# Altium PCB PCB1.pcbdoc (part 2 of 2)
Units mil, origin at the board's own origin, x right, y up, seen from the top; angles counter-clockwise.
Board outline 3346.4 x 3346.4 mil, 4 copper layers (Top Layer, Inner1, Inner2, Bottom Layer), stack 62.5 mil thick; 85 components, 61 nets, 352 pads, 250 vias.
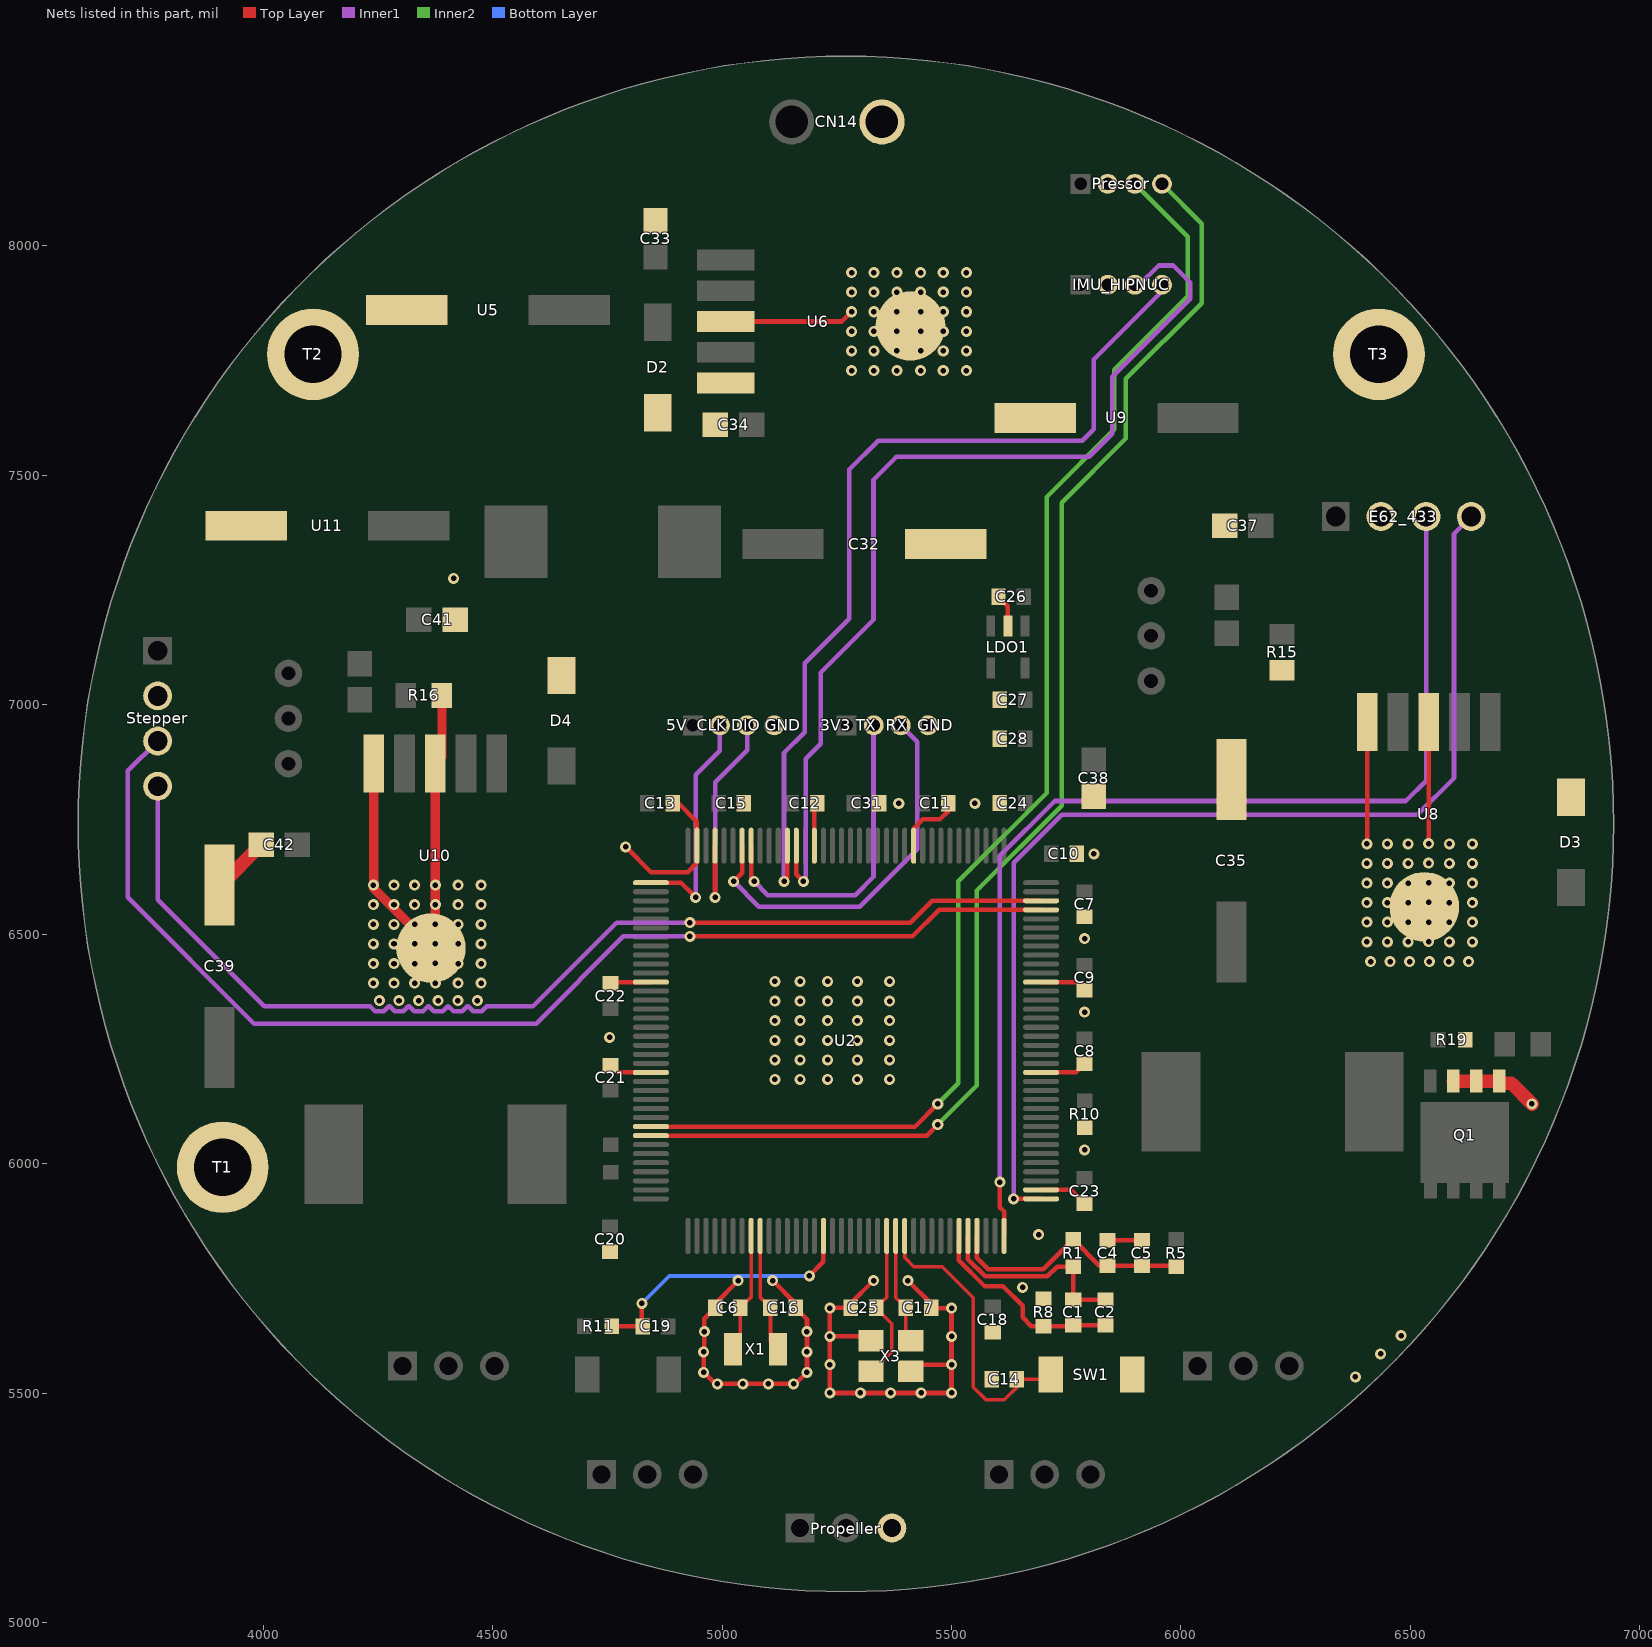
[diagram p4: the nets of this part, all layers, seen from the top]

## Via types
v1: diameter 24, hole 12, Top Layer to Bottom Layer, 250 vias

## Nets (pads, with @x,y where several pads share a name; then routed paths per layer and width w, separated by ;. In a path a pad name is that pad's centre, name@x,y a point inside that pad or via, vN(x,y) a via of type N, cw(c..) or ccw(c..) an arc to the next point about the centre after c; other vN are vias at no path point) (continued)
GND: "3V3 TX  RX  GND.4" "5V  CLK DIO GND.4" C4.2 C5.2 C6.2 C7.2 C8.1 C9.1 C10.1 C11.1 C12.1 C13.1 C14.2 C15.2 C16.2 C17.1 C18.1 C19.1 C20.1 C21.1 C22.1 C23.1 C24.1 C25.2 C26.1 C27.1 C28.1 C31.1 C32.2 C33.1 C34.1 C35.2 C37.1 C38.1 C39.2 C41.1 C42.1 CN14.1 D2.1 D3.1 D4.1 E62_433.2 IMU_HIPNUC.2 LDO1.2 Pressor.2 Propeller.3 Q1.1 Q1.2 Q1.3 R8.1 R10.1 R11.1 R15.2 R16.2 R19.1 Stepper.2 SW1.1 T1.1 T2.1 T3.1 U2.16 U2.38 U2.51 U2.61 U2.83 U2.94 U2.107 U2.120 U2.130 U5.2 U6.3 U6.5 U6.6 U8.3 U8.5 U8.6 U9.2 U10.3 U10.5 U10.6 U11.2 X3.2 X3.4 | length 5750.2
  Top Layer w10: C21.1@4757,6214.6 4772.8,6198.8 U2.130@4844.8,6198.8 ; C22.1@4757,6392.7 4759.9,6395.7 U2.120@4844.8,6395.7 ; R11.1@4759.3,5645.5 4759.7,5645.2 C19.1@4827.4,5645.2 4825,5647.6 v1(4825,5695.2) ; v1(4790,6690.2) 4845,6635.2 4925,6635.2 4945.2,6655.4 U2.107@4945.2,6692.9 4945.2,6745 4905,6785.2 C13.1@4892.6,6785.2 ; U6.3@5007.8,7835.2 5260.8,7835.2 v1(5282.2,7856.5) ; v1(5035,5745.2) 4984.8,5695 C6.2@4984.8,5685.8 4961.2,5662.2 v1(4961.2,5634.1) 4961.2,5590.9 v1(4960,5589.6) v1(4960,5545.2) 4985,5520.2 v1(4990,5520.2) v1(5045.4,5520.2) v1(5100.7,5520.2) v1(5156.1,5520.2) 5160,5520.2 v1(5185,5545.2) v1(5185,5589.6) v1(5185,5634.1) 5185,5661.2 C16.2@5160.5,5685.8 5160.5,5694.7 v1(5110,5745.2) ; v1(5190,5755.2) 5220.8,5785.9 U2.16@5220.8,5842.5 ; U2.94@5201.1,6692.9 5201.1,6778.7 C12.1@5207.6,6785.2 ; X3.4@5324.6,5614.2 5315.3,5623.5 v1(5235,5623.5) ; v1(5330,5745.2) 5280.4,5695.5 C25.2@5280.4,5685.8 5235.6,5685.8 v1(5235,5685.2) v1(5235,5623.5) ; v1(5405,5745.2) 5455.5,5694.7 C17.1@5455.5,5685.8 5456.1,5685.2 v1(5500,5685.2) v1(5500,5623.5) v1(5500,5561.8) ; X3.2@5411.2,5547.3 5425.8,5561.8 v1(5500,5561.8) ; U2.83@5417.6,6692.9 5417.6,6730.4 5437.4,6750.2 5474.9,6750.2 5492.6,6767.8 C11.1@5492.6,6785.2 ; C26.1@5602.4,7235.2 5622.9,7214.7 LDO1.2@5622.9,7171.2 ; U2.38@5695.2,5942.9 5759.7,5942.9 C23.1@5790,5912.6 ; U2.51@5695.2,6198.8 5771.2,6198.8 C8.1@5790,6217.6 ; U2.61@5695.2,6395.7 5695.7,6395.2 5772.4,6395.2 C9.1@5790,6377.6 ; C4.2@5840,5832.7 C5.2@5915,5832.7 ; v1(6405,6697) 6406,6698 U8.5@6406,6962.3 ; v1(6540,6697.4) U8.3@6540,6962.3 ; v1(5235,5623.5) v1(5235,5561.8) v1(5235,5500.2) v1(5301.3,5500.2) v1(5367.5,5500.2) v1(5433.8,5500.2) v1(5500,5500.2) v1(5500,5561.8)
  Top Layer w20: U10.5@4241,6872.3 4241,6599.5 4362.5,6478 4375,6490.5 v1(4375,6521.8) v1(4375,6564.5) v1(4375,6607.2) U10.3@4375,6872.3 4389.4,6886.7 R16.2@4389.4,7020.2
  Top Layer w30: C39.2@3905,6607.3 3907.8,6607.3 C42.1@3995.6,6695.2 ; Q1.3@6593.6,6179.6 Q1.2@6643.7,6179.6 Q1.1@6693.6,6179.6 6698,6175.2 6720,6175.2 v1(6765,6130.2)
  Bottom Layer w8: v1(4825,5695.2) 4885,5755.2 v1(5190,5755.2)
  other v1: 6380,5535.2 6435,5585.2 6480,5625.2 5655,5730.2 5690,5845.2 5790,6030.2 5115,6183.4 5170,6183.4 5230,6183.4 5295,6183.4 5365,6183.4 5115,6226.1 5170,6226.1 5230,6226.1 5295,6226.1 5365,6226.1 5115,6268.8 5170,6268.8 5230,6268.8 5295,6268.8 5365,6268.8 4755,6275.2 5115,6311.5 5170,6311.5 5230,6311.5 5295,6311.5 5365,6311.5 5790,6330.2 5115,6354.2 5170,6354.2 5230,6354.2 5295,6354.2 5365,6354.2 4253.2,6355.2 4295.9,6355.2 4338.6,6355.2 4381.4,6355.2 4424.1,6355.2 4466.8,6355.2 4240,6393.4 4285,6393.4 4330,6393.4 4425,6393.4 4475,6393.4 4375,6393.6 5115,6397 5170,6397 5230,6397 5295,6397 5365,6397 4240,6436.1 4285,6436.1 4330,6436.1 4375,6436.3 4425,6436.1 4475,6436.1 6413.2,6440.2 6455.9,6440.2 6498.6,6440.2 6541.4,6440.2 6584.1,6440.2 6626.8,6440.2 4240,6478.8 4285,6478.8 4330,6478.8 4375,6479 4425,6478.8 4475,6478.8 6405,6483.4 6450,6483.4 6495,6483.4 6585,6483.4 6635,6483.4 6540,6483.8 5790,6490.2 4240,6521.5 4285,6521.5 4330,6521.5 4425,6521.5 4475,6521.5 6405,6526.1 6450,6526.1 6495,6526.1 6540,6526.5 6585,6526.1 6635,6526.1 4240,6564.2 4285,6564.2 4330,6564.2 4425,6564.2 4475,6564.2 6405,6568.8 6450,6568.8 6495,6568.8 6540,6569.2 6585,6568.8 6635,6568.8 4240,6607 4285,6607 4330,6607 4425,6607 4475,6607 6405,6611.5 6450,6611.5 6495,6611.5 6540,6612 6585,6611.5 6635,6611.5 6405,6654.2 6450,6654.2 6495,6654.2 6585,6654.2 6635,6654.2 6540,6654.7 5810,6675.2 6450,6697 6495,6697 6585,6697 6635,6697 5385,6785.2 5550.8,6785.2 4415,7275.2 5282.2,7728.4 5330.6,7728.4 5381.1,7728.4 5432.6,7728.4 5482,7728.4 5532.5,7728.4 5282.2,7771.1 5330.6,7771.1 5381.1,7771.1 5432.6,7771.1 5482,7771.1 5532.5,7771.1 5282.2,7813.8 5330.6,7813.8 5381.1,7813.8 5432.6,7813.8 5482,7813.8 5532.5,7813.8 5330.6,7856.5 5381.1,7856.5 5432.6,7856.5 5482,7856.5 5532.5,7856.5 5282.2,7899.2 5330.6,7899.2 5381.1,7899.2 5432.6,7899.2 5482,7899.2 5532.5,7899.2 5282.2,7942 5330.6,7942 5381.1,7942 5432.6,7942 5482,7942 5532.5,7942
HSE_IN: C25.1 U2.23 X3.1 | length 339.3
  Top Layer w8: X3.1@5324.6,5547.3 5327.1,5547.3 5370,5590.2 5370,5651.2 C25.1@5335.5,5685.8 5358.6,5708.9 U2.23@5358.6,5842.5
HSE_OUT: C17.2 U2.24 X3.3 | length 241.9
  Top Layer w8: U2.24@5378.3,5842.5 5378.3,5707.8 C17.2@5400.4,5685.8 5400.4,5625.1 X3.3@5411.2,5614.2
I2C1_SCL_PB6: Pressor.3 U2.136 | length 2924.3
  Top Layer w10: U2.136@4844.8,6080.7 5420.5,6080.7 v1(5470,6130.2)
  Inner2 w10: v1(5470,6130.2) 5515,6175.2 5515,6615.2 5707.5,6807.7 5707.5,7452.7 5855,7600.2 5855,7730.2 6015,7890.2 6015,8019.7 Pressor.3@5899.5,8135.2
I2C1_SDA_PB7: Pressor.4 U2.137 | length 2959.2
  Top Layer w10: U2.137@4844.8,6061 5445.9,6061 v1(5470,6085.2)
  Inner2 w10: v1(5470,6085.2) 5555,6170.2 5555,6595.2 5740,6780.2 5740,7440.2 5880,7580.2 5880,7710.2 6045,7875.2 6045,8048.7 Pressor.4@5958.6,8135.2
LSE_IN: C6.1 U2.8 X1.1 | length 263.1
  Top Layer w8: X1.1@5023.7,5595.8 5039.9,5612 C6.1@5039.9,5685.8 5063.3,5709.1 U2.8@5063.3,5842.5
LSE_OUT: C16.1 U2.9 X1.2 | length 262.9
  Top Layer w8: U2.9@5083,5842.5 5083,5708.1 C16.1@5105.4,5685.8 5105.4,5612.5 X1.2@5122.1,5595.8
NRST: C14.1 SW1.2 U2.25 | length 641.4
  Top Layer w8: U2.25@5397.9,5842.5 5397.9,5795.2 5417.9,5775.2 5480,5775.2 5547.5,5707.7 5547.5,5512.7 5575,5485.2 5615,5485.2 5642.6,5512.7 C14.1@5642.6,5530.2 5706.4,5530.2 SW1.2@5716.4,5540.2
SWCLK: "5V  CLK DIO GND.2" U2.109 | length 507.8
  Top Layer w10: U2.109@4844.8,6612.2 4910.4,6612.2 v1(4942.5,6580.2)
  Inner1 w10: v1(4942.5,6580.2) 4942.5,6847.6 4995,6900.2 4995,6954.7 4995.5,6955.2
SWDIO: "5V  CLK DIO GND.3" U2.105 | length 516.7
  Top Layer w10: U2.105@4984.6,6692.9 4984.6,6580.6 v1(4985,6580.2)
  Inner1 w10: v1(4985,6580.2) 4985,6831.2 5054.5,6900.7 5054.5,6955.2
USART1_RX_PA10: "3V3 TX  RX  GND.3" U2.102 | length 844.7
  Top Layer w10: v1(5025,6615.2) 5043.6,6633.8 U2.102@5043.6,6692.9
  Inner1 w10: v1(5025,6615.2) 5080,6560.2 5300,6560.2 5425,6685.2 5425,6919.7 5389.5,6955.2
USART1_TX_PA9: "3V3 TX  RX  GND.2" U2.101 | length 699.8
  Top Layer w10: U2.101@5063.3,6692.9 5063.3,6621.7 v1(5069.9,6615.2)
  Inner1 w10: v1(5069.9,6615.2) 5099.9,6585.2 5290,6585.2 5330,6625.2 5330,6954.7 5330.5,6955.2
USART2_RX_PA3: E62_433.4 U2.37 | length 2413.8
  Top Layer w10: v1(5635.5,5923.1) 5635.6,5923.2 U2.37@5695.2,5923.2
  Inner1 w10: v1(5635.5,5923.1) 5635.5,6655.7 5740,6760.2 6515,6760.2 6595,6840.2 6595,7372.5 E62_433.4@6632.6,7410.2
USART2_TX_PA2: E62_433.3 U2.36 | length 2404.3
  Top Layer w10: v1(5605.5,5959.7) 5605.5,5904.6 5614.5,5895.7 U2.36@5614.5,5842.5
  Inner1 w10: v1(5605.5,5959.7) 5605.5,6670.7 5725,6790.2 6490,6790.2 6534.2,6834.4 E62_433.3@6534.2,7410.2
USART3_RX_PB11: Stepper.4 U2.70 | length 2417.9
  Top Layer w10: v1(4930,6525.2) 5410,6525.2 5457.7,6572.8 U2.70@5695.2,6572.8
  Inner1 w10: Stepper.4@3770,6822.5 3770,6575.2 4002.1,6343.1 4232.8,6343.1 4243.7,6332.2 4262.7,6332.2 4273.6,6343.1 4275.5,6343.1 4286.4,6332.2 4305.4,6332.2 4316.4,6343.1 4318.2,6343.1 4329.1,6332.2 4348.2,6332.2 4359.1,6343.1 4360.9,6343.1 4371.8,6332.2 4390.9,6332.2 4401.8,6343.1 4403.6,6343.1 4414.6,6332.2 4433.6,6332.2 4444.5,6343.1 4446.4,6343.1 4457.3,6332.2 4476.3,6332.2 4487.2,6343.1 4587.9,6343.1 4770,6525.2 v1(4930,6525.2)
USART3_TX_PB10: Stepper.3 U2.69 | length 2574.4
  Top Layer w10: v1(4930,6495.2) 5415,6495.2 5473,6553.1 U2.69@5695.2,6553.1
  Inner1 w10: Stepper.3@3770,6920.9 3705,6855.9 3705,6580.2 3980,6305.2 4595,6305.2 4785,6495.2 v1(4930,6495.2)
USART6_RX_PC7: IMU_HIPNUC.4 U2.97 | length 1982.5
  Top Layer w10: v1(5135,6615.2) 5142.1,6622.2 U2.97@5142.1,6692.9
  Inner1 w10: v1(5135,6615.2) 5135,6895.2 5180,6940.2 5180,7090.2 5277.5,7187.7 5277.5,7512.7 5340,7575.2 5785,7575.2 5810,7600.2 5810,7752.4 5958.6,7901 IMU_HIPNUC.4@5958.6,7915.2
USART6_TX_PC6: IMU_HIPNUC.3 U2.96 | length 2137.4
  Top Layer w10: U2.96@5161.7,6692.9 5161.7,6630.8 v1(5177.4,6615.2)
  Inner1 w10: v1(5177.4,6615.2) 5182.4,6620.2 5182.4,6882.5 5215,6915.2 5215,7070.2 5330,7185.2 5330,7490.2 5380,7540.2 5800,7540.2 5850,7590.2 5850,7715.2 6020,7885.2 6020,7920.2 5982.9,7957.2 5951.6,7957.2 5909.5,7915.2 IMU_HIPNUC.3@5899.5,7915.2
VDDA: C4.1 C5.1 R1.2 R5.1 U2.33 | length 543.6
  Top Layer w10: U2.33@5555.4,5842.5 5555.4,5795 5580.3,5770.2 5700.3,5770.2 R1.2@5765,5834.8 5822.2,5777.6 C4.1@5840,5777.6 C5.1@5915,5777.6 5987.9,5777.6 R5.1@5990,5775.5
VREF+: C1.2 C2.2 R1.1 U2.32 | length 446.7
  Top Layer w10: U2.32@5535.8,5842.5 5535.8,5792 5573.6,5754.2 5709,5754.2 5730.3,5775.5 R1.1@5765,5775.5 5765,5703.8 C1.2@5765.5,5703.2 C2.2@5835.5,5703.2
VSSA: C1.1 C2.1 R8.2 U2.31 | length 437.6
  Top Layer w10: U2.31@5516.1,5832.5 5516.1,5789.1 5572,5733.2 5612,5733.2 5655,5690.2 5655,5665.2 5674.1,5646 R8.2@5700.5,5646 5763.4,5646 C1.1@5765.5,5648.1 C2.1@5835.5,5648.1
pads on no net: LDO1.4 R2.3 R17.3 U2.1 U2.2 U2.3 U2.4 U2.5 U2.6 U2.7 U2.10 U2.28 U2.29 U2.44 U2.45 U2.46 U2.47 U2.49 U2.50 U2.53 U2.54 U2.55 U2.56 U2.57 U2.58 U2.59 U2.60 U2.63 U2.64 U2.65 U2.66 U2.67 U2.68 U2.73 U2.74 U2.75 U2.76 U2.77 U2.78 U2.79 U2.80 U2.86 U2.87 U2.88 U2.89 U2.90 U2.91 U2.92 U2.93 U2.98 U2.99 U2.100 U2.103 U2.104 U2.110 U2.111 U2.112 U2.114 U2.115 U2.117 U2.118 U2.119 U2.122 U2.123 U2.124 U2.125 U2.126 U2.127 U2.128 U2.129 U2.132 U2.133 U2.134 U2.135 U2.139 U2.140 U2.141 U2.142

## Polygon pours and split planes (outlines as drawn)
GND on Top Layer (solid, remove dead copper, pour order 0): 3000,8610.2 3000,4795.2 7505,4795.2 7505,8610.2
GND on Inner1 (solid, remove dead copper): 3130,8620.2 3130,4735.2 7380,4735.2 7380,8620.2
GND on Inner2 (solid, remove dead copper): 3105,8645.2 3105,4640.2 7475,4640.2 7475,8645.2
GND on Bottom Layer (solid, remove dead copper, pour order 2): 3020,8685.2 3020,4730.2 7265,4730.2 7265,8685.2

## Keep-outs
Board Outline Layer:
  region: 4937.9,5726.1 4937.9,5480.8 5517.9,5480.8 5517.9,5726.1
  region: 4475,7560.2 4475,7150.2 5000,7150.2 5000,7560.2
  region: 4079.7,6277.4 4079.7,5760.2 4675,5760.2 4675,6277.4
  region: 5905,6395.2 5905,5875.2 6495,5875.2 6495,6395.2
  lines w10: 3596.8,6740.2 3597.2,6703.7 3598.4,6667.2 3600.4,6630.7 3603.1,6594.3 3606.7,6558 3611.1,6521.8 3616.2,6485.6 3622.2,6449.6 3628.9,6413.7 3636.4,6378 3644.7,6342.5 3653.8,6307.1 3663.6,6271.9 3674.2,6237 3685.6,6202.3 3697.7,6167.9 3710.5,6133.7 3724.1,6099.8 3738.5,6066.3 3753.5,6033 3769.3,6000.1 3785.8,5967.5 3803,5935.4 3820.9,5903.5 3839.5,5872.1 3858.8,5841.1 3878.8,5810.6 3899.4,5780.4 3920.6,5750.8 3942.5,5721.6 3965.1,5692.8 3988.2,5664.6 4012,5636.9 4036.4,5609.7 4061.3,5583.1 4086.8,5557 4112.9,5531.5 4139.6,5506.5 4166.8,5482.2 4194.5,5458.4 4222.7,5435.2 4251.4,5412.7 4280.6,5390.8 4310.3,5369.5 4340.4,5348.9 4371,5329 4402,5309.7 4433.4,5291.1 4465.2,5273.2 4497.4,5256 4530,5239.5 4562.9,5223.7 4596.1,5208.6 4629.7,5194.3 4663.6,5180.7 4697.7,5167.8 4732.2,5155.7 4766.9,5144.4 4801.8,5133.8 4836.9,5123.9 4872.3,5114.9 4907.8,5106.6 4943.6,5099.1 4979.4,5092.3 5015.5,5086.4 5051.6,5081.2 5087.8,5076.9 5124.2,5073.3 5160.6,5070.5 5197,5068.5 5233.5,5067.3 5270,5066.9 5306.5,5067.3 5343,5068.5 5379.4,5070.5 5415.8,5073.3 5452.2,5076.9 5488.4,5081.2 5524.5,5086.4 5560.6,5092.3 5596.4,5099.1 5632.2,5106.6 5667.7,5114.9 5703.1,5123.9 5738.2,5133.8 5773.1,5144.4 5807.8,5155.7 5842.3,5167.8 5876.4,5180.7 5910.3,5194.3 5943.9,5208.6 5977.1,5223.7 6010,5239.5 6042.6,5256 6074.8,5273.2 6106.6,5291.1 6138,5309.7 6169,5329 6199.6,5348.9 6229.7,5369.5 6259.4,5390.8 6288.6,5412.7 6317.3,5435.2 6345.5,5458.4 6373.2,5482.2 6400.4,5506.5 6427.1,5531.5 6453.2,5557 6478.7,5583.1 6503.6,5609.7 6528,5636.9 6551.8,5664.6 6574.9,5692.8 6597.5,5721.6 6619.4,5750.8 6640.6,5780.4 6661.2,5810.6 6681.2,5841.1 6700.5,5872.1 6719.1,5903.5 6737,5935.4 6754.2,5967.5 6770.7,6000.1 6786.5,6033 6801.5,6066.3 6815.9,6099.8 6829.5,6133.7 6842.3,6167.9 6854.4,6202.3 6865.8,6237 6876.4,6271.9 6886.2,6307.1 6895.3,6342.5 6903.6,6378 6911.1,6413.7 6917.8,6449.6 6923.8,6485.6 6928.9,6521.8 6933.3,6558 6936.9,6594.3 6939.6,6630.7 6941.6,6667.2 6942.8,6703.7 6943.2,6740.2 6942.8,6776.7 6941.6,6813.1 6939.6,6849.6 6936.9,6886 6933.3,6922.3 6928.9,6958.6 6923.8,6994.7 6917.8,7030.7 6911.1,7066.6 6903.6,7102.3 6895.3,7137.9 6886.2,7173.2 6876.4,7208.4 6865.8,7243.3 6854.4,7278 6842.3,7312.4 6829.5,7346.6 6815.9,7380.5 6801.5,7414 6786.5,7447.3 6770.7,7480.2 6754.2,7512.8 6737,7545 6719.1,7576.8 6700.5,7608.2 6681.2,7639.2 6661.2,7669.8 6640.6,7699.9 6619.4,7729.6 6597.5,7758.8 6574.9,7787.5 6551.8,7815.7 6528,7843.4 6503.6,7870.6 6478.7,7897.2 6453.2,7923.3 6427.1,7948.8 6400.4,7973.8 6373.2,7998.2 6345.5,8021.9 6317.3,8045.1 6288.6,8067.6 6259.4,8089.5 6229.7,8110.8 6199.6,8131.4 6169,8151.3 6138,8170.6 6106.6,8189.2 6074.8,8207.1 6042.6,8224.3 6010,8240.8 5977.1,8256.6 5943.9,8271.7 5910.3,8286 5876.4,8299.6 5842.3,8312.5 5807.8,8324.6 5773.1,8335.9 5738.2,8346.5 5703.1,8356.4 5667.7,8365.4 5632.2,8373.7 5596.4,8381.2 5560.6,8388 5524.5,8393.9 5488.4,8399.1 5452.2,8403.4 5415.8,8407 5379.4,8409.8 5343,8411.8 5306.5,8413 5270,8413.4 5233.5,8413 5197,8411.8 5160.6,8409.8 5124.2,8407 5087.8,8403.4 5051.6,8399.1 5015.5,8393.9 4979.4,8388 4943.6,8381.2 4907.8,8373.7 4872.3,8365.4 4836.9,8356.4 4801.8,8346.5 4766.9,8335.9 4732.2,8324.6 4697.7,8312.5 4663.6,8299.6 4629.7,8286 4596.1,8271.7 4562.9,8256.6 4530,8240.8 4497.4,8224.3 4465.2,8207.1 4433.4,8189.2 4402,8170.6 4371,8151.3 4340.4,8131.4 4310.3,8110.8 4280.6,8089.5 4251.4,8067.6 4222.7,8045.1 4194.5,8021.9 4166.8,7998.2 4139.6,7973.8 4112.9,7948.8 4086.8,7923.3 4061.3,7897.2 4036.4,7870.6 4012,7843.4 3988.2,7815.7 3965.1,7787.5 3942.5,7758.8 3920.6,7729.6 3899.4,7699.9 3878.8,7669.8 3858.8,7639.2 3839.5,7608.2 3820.9,7576.8 3803,7545 3785.8,7512.8 3769.3,7480.2 3753.5,7447.3 3738.5,7414 3724.1,7380.5 3710.5,7346.6 3697.7,7312.4 3685.6,7278 3674.2,7243.3 3663.6,7208.4 3653.8,7173.2 3644.7,7137.9 3636.4,7102.3 3628.9,7066.6 3622.2,7030.7 3616.2,6994.7 3611.1,6958.6 3606.7,6922.3 3603.1,6886 3600.4,6849.6 3598.4,6813.1 3597.2,6776.7 3596.8,6740.2

## Other copper
Top Layer:
  drawing of 291 lines, arcs and shapes, not listed
Inner1:
  region net D12: 5989.6,5554.1 5989.6,5564.1 5993.1,5564.4 5996.4,5565.3 5999.5,5566.9 6002.3,5569 6004.6,5571.6 6004.6,5546.6 6002.3,5549.1 5999.5,5551.2 5996.4,5552.8 5993.1,5553.7 5989.6,5554.1
  region net A6: 5566.3,5352.6 5573.3,5359.6 5576.9,5357.4 5580.9,5355.7 5585,5354.7 5589.3,5354.3 5571.6,5336.7 5571.2,5340.9 5570.2,5345 5568.5,5349 5566.3,5352.6
  region net D14: 5165,5252.3 5175,5252.3 5175.3,5248.8 5176.3,5245.5 5177.8,5242.4 5179.9,5239.6 5182.5,5237.3 5157.5,5237.3 5160.1,5239.6 5162.2,5242.4 5163.7,5245.5 5164.7,5248.8 5165,5252.3
  region net D13: 4303.9,5605.6 4313.9,5605.6 4314.2,5602.1 4315.1,5598.8 4316.7,5595.7 4318.8,5592.9 4321.4,5590.6 4296.4,5590.6 4298.9,5592.9 4301,5595.7 4302.6,5598.8 4303.5,5602.1 4303.9,5605.6
  region net A7: 4773.7,5293.1 4766.7,5286 4763.1,5288.3 4759.1,5290 4755,5291 4750.7,5291.3 4768.4,5309 4768.8,5304.8 4769.8,5300.6 4771.5,5296.7 4773.7,5293.1
  region net USART3_RX_PB11: 3775,6779.6 3765,6779.6 3764.9,6782.1 3764.6,6784.2 3764.1,6786 3763.4,6787.5 3762.6,6788.9 3761.6,6790 3760.4,6791 3759.2,6792 3753.2,6795.8 3749.9,6798.3 3748.1,6799.9 3746.4,6801.7 3793.6,6801.7 3791.9,6799.9 3790.1,6798.3 3786.8,6795.8 3780.8,6792 3779.6,6791 3778.4,6790 3777.4,6788.9 3776.6,6787.5 3775.9,6786 3775.4,6784.2 3775.1,6782.1
  region net USART3_TX_PB10: 3743.2,6887.1 3736.1,6894.2 3737.8,6896 3739.1,6897.7 3740,6899.3 3740.6,6900.9 3740.9,6902.4 3741.1,6903.9 3741,6905.5 3740.8,6907 3739.2,6913.9 3738.6,6918.1 3738.5,6920.4 3738.6,6922.9 3772,6889.5 3769.4,6889.5 3767.1,6889.6 3763,6890.2 3756.1,6891.7 3754.5,6891.9 3753,6892 3751.5,6891.9 3749.9,6891.5 3748.4,6890.9 3746.7,6890 3745,6888.7
  region net USART6_TX_PC6: 5925,7937.7 5924.6,7923.2 5923.4,7921.6 5922.5,7919.7 5921.9,7917.6 5921.4,7915.4 5920.6,7910.9 5920.2,7908.8 5919.5,7906.8 5905.3,7936 5910.6,7934.7 5913.3,7934.3 5915.9,7934.2 5918.4,7934.4 5920.8,7935 5923,7936.1
  region net USART6_RX_PC7: 5954.8,7890.2 5937.1,7886.6 5938.7,7888.6 5939.8,7890.9 5940.5,7893.3 5940.8,7896 5940.8,7898.7 5940.4,7901.3 5939.7,7903.9 5938.8,7906.4 5969.8,7896.6 5967.8,7895.6 5965.8,7894.9 5961.9,7893.8 5960.1,7893.3 5958.2,7892.6 5956.5,7891.6
  region net USART1_TX_PA9: 5335,6925.3 5325,6926 5324.8,6928.9 5324,6931.1 5323,6932.9 5321.5,6934.4 5318,6937.3 5316,6939 5313.9,6941.2 5346.4,6940.5 5344.3,6938.4 5342.2,6936.7 5338.6,6933.7 5337.1,6932.2 5336,6930.4 5335.3,6928.1
  region net USART1_RX_PA10: 5413.9,6937.8 5406.8,6930.8 5404.7,6932.6 5402.6,6933.7 5400.5,6934.2 5398.4,6934.2 5393.8,6933.7 5391.2,6933.5 5388.2,6933.5 5411.1,6956.5 5411.2,6953.5 5410.9,6950.9 5410.5,6946.3 5410.5,6944.2 5411,6942.1 5412.1,6940
  region net SWCLK: 5000,6925.3 4990,6926 4989.8,6928.9 4989,6931.1 4988,6932.9 4986.5,6934.4 4983,6937.3 4981,6939 4978.9,6941.2 5011.4,6940.5 5009.3,6938.4 5007.2,6936.7 5003.6,6933.7 5002.1,6932.2 5001,6930.4 5000.3,6928.1
  region net SWDIO: 5059.5,6925.7 5049.5,6925.7 5049.3,6928.5 5048.6,6930.7 5047.5,6932.5 5046,6934.1 5042.4,6937 5040.4,6938.7 5038.3,6940.8 5070.8,6940.8 5068.7,6938.7 5066.6,6937 5063,6934.1 5061.6,6932.5 5060.5,6930.7 5059.8,6928.5
  region net USART1_RX_PA10: 5040.1,6607.1 5033,6600.1 5032.2,6600.8 5031.2,6601.4 5029,6602.3 5026.6,6602.9 5024.2,6603.2 5037,6615.9 5037.2,6613.6 5037.8,6611.2 5038.7,6609 5039.4,6608
  region net USART1_TX_PA9: 5085,6607.1 5077.9,6600.1 5077,6600.8 5076,6601.4 5073.8,6602.3 5071.5,6602.9 5069.1,6603.2 5081.8,6615.9 5082.1,6613.6 5082.7,6611.2 5083.6,6609 5084.2,6608
  region net SWDIO: 4980,6596.5 4990,6596.5 4990.1,6595.4 4990.3,6594.2 4991.3,6592 4992.5,6589.9 4994,6588.1 4976,6588.1 4977.5,6589.9 4978.7,6592 4979.7,6594.2 4979.9,6595.4
  region net SWCLK: 4937.5,6596.5 4947.5,6596.5 4947.6,6595.4 4947.8,6594.2 4948.7,6592 4950,6589.9 4951.5,6588.1 4933.5,6588.1 4935,6589.9 4936.2,6592 4937.1,6594.2 4937.4,6595.4
  region net BOOT0: 4977,6021.7 4967,6021.7 4966.9,6022.8 4966.7,6024 4965.7,6026.2 4964.5,6028.2 4963,6030.1 4981,6030.1 4979.5,6028.2 4978.3,6026.2 4977.3,6024 4977.1,6022.8
  region net BOOT0: 4789.4,5714.1 4796.5,5707.1 4795.7,5706.2 4795.1,5705.2 4794.2,5703 4793.6,5700.6 4793.4,5698.3 4780.6,5711 4783,5711.3 4785.4,5711.8 4787.6,5712.8 4788.5,5713.4
  region net D13: 5396.5,6599.5 5389.4,6606.6 5390.1,6607.5 5390.7,6608.5 5391.7,6610.7 5392.2,6613 5392.5,6615.4 5405.2,6602.6 5402.9,6602.4 5400.5,6601.8 5398.3,6600.9 5397.3,6600.3
  region net D12: 5477.8,6620.2 5477.8,6610.2 5476.7,6610.1 5475.5,6609.8 5473.3,6608.9 5471.3,6607.6 5469.4,6606.2 5469.4,6624.2 5471.3,6622.7 5473.3,6621.4 5475.5,6620.5 5476.7,6620.2
  region net D14: 5372,6540.1 5364.9,6547.1 5365.6,6548 5366.3,6549 5367.2,6551.2 5367.8,6553.6 5368,6555.9 5380.8,6543.2 5378.4,6542.9 5376,6542.3 5373.8,6541.4 5372.8,6540.8
  region net A7: 5475,6018.8 5465,6018.8 5464.9,6019.9 5464.7,6021.1 5463.7,6023.3 5462.5,6025.4 5461,6027.2 5479,6027.2 5477.5,6025.4 5476.3,6023.3 5475.3,6021.1 5475.1,6019.9
  region net A6: 5517.1,5996.8 5510,5989.8 5509.2,5990.5 5508.2,5991.1 5506,5992.1 5503.6,5992.6 5501.3,5992.9 5514,6005.6 5514.3,6003.3 5514.8,6000.9 5515.7,5998.7 5516.4,5997.7
  region net USART2_RX_PA3: 5630.5,5939.5 5640.5,5939.5 5640.6,5938.4 5640.9,5937.2 5641.8,5935 5643.1,5932.9 5644.5,5931.1 5626.5,5931.1 5628,5932.9 5629.3,5935 5630.2,5937.2 5630.4,5938.4
  region net USART2_TX_PA2: 5600.5,5976 5610.5,5976 5610.6,5974.9 5610.9,5973.8 5611.8,5971.5 5613.1,5969.5 5614.5,5967.6 5596.5,5967.6 5598,5969.5 5599.3,5971.5 5600.2,5973.8 5600.4,5974.9
  region net USART3_RX_PB11: 4913.7,6520.2 4913.7,6530.2 4914.8,6530.2 4915.9,6530.5 4918.1,6531.4 4920.2,6532.7 4922.1,6534.2 4922.1,6516.2 4920.2,6517.6 4918.1,6518.9 4915.9,6519.8 4914.8,6520.1
  region net USART3_TX_PB10: 4913.7,6490.2 4913.7,6500.2 4914.8,6500.2 4915.9,6500.5 4918.1,6501.4 4920.2,6502.7 4922.1,6504.2 4922.1,6486.2 4920.2,6487.6 4918.1,6488.9 4915.9,6489.8 4914.8,6490.1
  region net USART6_RX_PC7: 5130,6631.5 5140,6631.5 5140.1,6630.4 5140.3,6629.2 5141.3,6627 5142.5,6624.9 5144,6623.1 5126,6623.1 5127.5,6624.9 5128.7,6627 5129.7,6629.2 5129.9,6630.4
  region net USART6_TX_PC6: 5177.4,6634.5 5187.4,6627 5187.5,6625 5187.8,6622.8 5188.9,6618.6 5172.5,6626.1 5173.5,6626.7 5174.5,6627.5 5175.3,6628.5 5176,6629.6 5176.6,6630.8 5177,6632.1 5177.3,6633.3
  region net USART2_RX_PA3: 6605.9,7376.3 6598.8,7383.4 6600.4,7385.2 6601.7,7386.9 6602.6,7388.5 6603.2,7390.1 6603.6,7391.6 6603.7,7393.1 6603.6,7394.7 6603.4,7396.2 6601.9,7403.1 6601.3,7407.3 6601.1,7409.6 6601.2,7412.1 6634.6,7378.7 6632.1,7378.7 6629.8,7378.8 6625.6,7379.4 6618.7,7380.9 6617.1,7381.1 6615.6,7381.2 6614.1,7381.1 6612.6,7380.8 6611,7380.1 6609.4,7379.2 6607.7,7378
  region net USART2_TX_PA2: 6539.2,7367.3 6529.2,7367.3 6529.1,7369.7 6528.8,7371.8 6528.3,7373.6 6527.6,7375.2 6526.8,7376.5 6525.8,7377.7 6524.6,7378.7 6523.4,7379.6 6517.4,7383.4 6514.1,7385.9 6512.3,7387.5 6510.6,7389.3 6557.8,7389.3 6556.1,7387.5 6554.4,7385.9 6551,7383.4 6545,7379.6 6543.8,7378.7 6542.6,7377.7 6541.7,7376.5 6540.8,7375.2 6540.1,7373.6 6539.6,7371.8 6539.3,7369.7
Inner2:
  region net I2C1_SCL_PB6: 5923.9,8117.8 5916.8,8110.8 5914.7,8112.6 5912.6,8113.7 5910.5,8114.2 5908.4,8114.2 5903.8,8113.7 5901.2,8113.5 5898.2,8113.5 5921.1,8136.5 5921.2,8133.5 5920.9,8130.9 5920.5,8126.3 5920.5,8124.2 5921,8122.1 5922.1,8120
  region net I2C1_SDA_PB7: 5983,8117.8 5975.9,8110.8 5973.7,8112.6 5971.6,8113.7 5969.6,8114.2 5967.5,8114.2 5962.9,8113.7 5960.2,8113.5 5957.2,8113.5 5980.2,8136.5 5980.2,8133.5 5980,8130.9 5979.5,8126.3 5979.6,8124.2 5980.1,8122.1 5981.1,8120
  region net F2: 5158.4,5905.1 5158.4,5895.1 5157.3,5895 5156.1,5894.8 5153.9,5893.9 5151.8,5892.6 5150,5891.1 5150,5909.1 5151.8,5907.6 5153.9,5906.4 5156.1,5905.5 5157.3,5905.2
  region net F2: 6759.8,6180.1 6752.8,6187.1 6753.5,6188 6754.1,6189 6755,6191.2 6755.6,6193.6 6755.9,6195.9 6768.6,6183.2 6766.3,6182.9 6763.9,6182.3 6761.7,6181.4 6760.7,6180.8
  region net I2C1_SCL_PB6: 5478,6145.3 5485.1,6138.2 5484.4,6137.3 5483.7,6136.3 5482.8,6134.1 5482.2,6131.8 5482,6129.4 5469.2,6142.1 5471.6,6142.4 5474,6143 5476.2,6143.9 5477.2,6144.5
  region net I2C1_SDA_PB7: 5478,6100.3 5485.1,6093.2 5484.4,6092.3 5483.7,6091.3 5482.8,6089.1 5482.2,6086.8 5482,6084.4 5469.2,6097.1 5471.6,6097.4 5474,6098 5476.2,6098.9 5477.2,6099.5
Bottom Layer:
  region net +5V: 5110.1,7480.2 5110.1,7650.2 5589.8,7650.2 5589.8,7914.8 5615.1,7940.2 5757.7,7940.2 5757.7,8187.9 5780,8210.2 6030,8210.2 6265,7975.2 6265,7645.1 6374.9,7535.2 6374.9,7370.2 6300.4,7370.2 6300.4,7544.7 6230,7615.2 6230,7950.2 6000,8180.2 5815,8180.2 5805,8170.2 5805,7890.2 5650,7890.2 5625,7865.2 5625,7625.2 5605,7605.2 5230,7605.2 5230,7480.2
  region net +8V4: 5755,7360.2 6030,7360.2 6030,7204.8 5856.3,7204.8 5856.3,6930.2 5995,6791.4 5995,6075.2 6175,5895.2 6175,5535.2 6150,5510.2 6115.1,5510.2 6090,5535.3 6090,5845.2 5910,6025.2 5910,6780.3 5755.1,6935.2 5755,6935.2
  region net +8V4: 4365,5590.2 4380,5605.2 4435,5605.2 4445,5595.2 4445,5505.2 4540,5410.2 5670.5,5410.2 5715.1,5454.7 6009.4,5454.7 6090,5535.3 6090,5595.2 6175,5595.2 6175,5535.2 6040,5400.2 5745,5400.2 5745,5300.2 5725,5280.2 5681.1,5280.2 5660,5301.3 5660,5370.2 4907.7,5370.2 4879.2,5341.6 4879.2,5299.3 4860,5280.2 4809.6,5280.2 4795,5294.8 4795,5370.2 4500,5370.2 4365,5505.2
  region net +20V: 4130,6760.2 3946.8,6760.2 3865,6841.9 3865,7055.2 3844.3,7075.9 3739.3,7075.9 3720,7095.2 3720,7145.2 3740,7165.2 3844.5,7165.2 3904.5,7105.2 3905,7105.2 3905,6913.7 4128.5,6913.7 4130,6912.2
  region net +20V: 3946.8,6760.2 4040,6760.2 4040,5650.2 4229,5461.2 4415,5335.2 4465.7,5307.3 4670,5215.2 4755,5175.2 4923.7,5127 5020.7,5107.3 5322.3,5107.3 5322.3,5232.8 5295,5260.2 5250,5260.2 5225,5235.2 5225,5160.7 4996.5,5160.7 4855,5195.2 4794.8,5210.4 4455,5360.2 4277.8,5471.1 4130,5648.6 4130,6910.2 3950,6910.2 3945,6905.2 3945,6759.7 3946.3,6759.7
  region net +5V: 4905,6930.2 4965,6930.2 4965,7012.6 5012.5,7060.2 5190,7060.2 5225,7095.2 5225,7650.2 5110,7650.2 5110,7479.4 5170,7479.4 5170,7125.2 5130,7085.2 4975,7085.2 4905,7015.2
  region net +3V3: 5228.8,5783.5 5228.8,5791.5 5230.1,5791.6 5231.3,5791.9 5232.3,5792.4 5233.3,5793 5235.2,5794.6 5237.2,5796.5 5237.2,5778.5 5235.2,5780.3 5233.3,5781.9 5232.3,5782.6 5231.3,5783 5230.1,5783.4
  region net +3V3: 5671.3,5620.2 5671.3,5610.2 5670.2,5610.1 5669.1,5609.8 5666.9,5608.9 5664.8,5607.6 5662.9,5606.2 5662.9,5624.2 5664.8,5622.7 5666.9,5621.4 5669.1,5620.5 5670.2,5620.2
  region net +3V3: 5854.1,5960.1 5847,5953.1 5846.2,5953.8 5845.2,5954.4 5843,5955.3 5840.6,5955.9 5838.2,5956.2 5851,5968.9 5851.2,5966.6 5851.8,5964.2 5852.7,5962 5853.4,5961
  region net +3V3: 4721.9,5732.8 4718,5724.8 4716.6,5724.7 4715.5,5724.5 4714.5,5724.1 4713.6,5723.6 4711.8,5722.3 4709.6,5720.9 4713.5,5738.5 4715.1,5736.4 4717.1,5734.6 4718.2,5733.9 4719.4,5733.3 4720.6,5732.9
  region net GND: 5040.3,5759.2 5055.4,5751.2 5052.1,5751 5050.6,5750.8 5049.3,5750.4 5048.3,5749.8 5047.5,5748.9 5047,5747.8 5047,5746.3 5031.9,5756.8 5036.1,5758.2 5038.3,5758.9
  region net GND: 5014.6,5751.2 5029.7,5759.2 5031.7,5758.9 5033.9,5758.2 5038.1,5756.8 5023,5746.3 5023,5747.8 5022.5,5748.9 5021.7,5749.8 5020.7,5750.4 5019.4,5750.8 5017.9,5751
  region net GND: 5115.3,5759.2 5130.4,5751.2 5127.1,5751 5125.6,5750.8 5124.3,5750.4 5123.3,5749.8 5122.5,5748.9 5122,5747.8 5122,5746.3 5106.9,5756.8 5111.1,5758.2 5113.3,5758.9
  region net GND: 5089.6,5751.2 5104.7,5759.2 5106.7,5758.9 5108.9,5758.2 5113.1,5756.8 5098,5746.3 5098,5747.8 5097.5,5748.9 5096.7,5749.8 5095.7,5750.4 5094.4,5750.8 5092.9,5751
  region net GND: 5173.7,5751.2 5173.7,5759.2 5175,5759.3 5176.2,5759.6 5177.2,5760.1 5178.2,5760.7 5180.1,5762.3 5182.1,5764.2 5182.1,5746.2 5180.1,5748 5178.2,5749.6 5177.2,5750.2 5176.2,5750.7 5175,5751
  region net GND: 4833.7,5709.5 4839.4,5703.9 4838.5,5702.9 4837.9,5701.8 4837.5,5700.7 4837.3,5699.6 4837.1,5697.1 4837,5694.4 4824.2,5707.1 4826.9,5707.2 4829.4,5707.4 4830.6,5707.7 4831.7,5708.1 4832.7,5708.7

## Silkscreen, mask and mechanical layers (free items; w line width, h text height)
Top Silkscreen Layer:
  drawing of 3 lines, arcs and shapes, not listed
  text "5V    GND    SCL    SDA" at 5780,8045.2 h25
  text "RCL / AMR / PKU" at 6080,7865.2 h60
  text "5V    GND    TX    RX" at 5790,7830.2 h25
  text "5V    GND    TX    RX" at 6410,7280.2 h25
  text "20V    GND    TX    RX" at 3640,7055.2 h25 r270
  text "PWM    8V4    -IN" at 4330,5695.2 h25
  text "PWM    8V4    -IN" at 6080,5695.2 h25
  text "PWM    8V4    -IN" at 4765,5140.2 h25
  text "PWM    8V4    -IN" at 5625,5140.2 h25
  text "PWM    20V    -IN" at 5200,5080.2 h25
Bottom Silkscreen Layer:
  text "Robotics and Control Laboratory" at 5933.3,7956.5 h120
  text "Version: V1.0   Date: 20250918" at 5885,7730.2 h120

## Dimensions
8225,6740.2 to 8225,3000 on Document Layer

## Text inside footprints (layer, text, board x,y; h text height)
CN14: Top Silkscreen Layer "-" at 5495,8285.2 h39.4 r180; Top Silkscreen Layer "+" at 5040,8290.2 h39.4 r180